# Altium PCB BSR033A.PcbDoc (part 1 of 2)
Units mil, origin at the board's own origin, x right, y up, seen from the top; angles counter-clockwise.
Board outline 1950 x 1400 mil, 2 copper layers (Top Layer, Bottom Layer), stack 61.2 mil thick; 52 components, 17 nets, 86 pads, 24 vias.
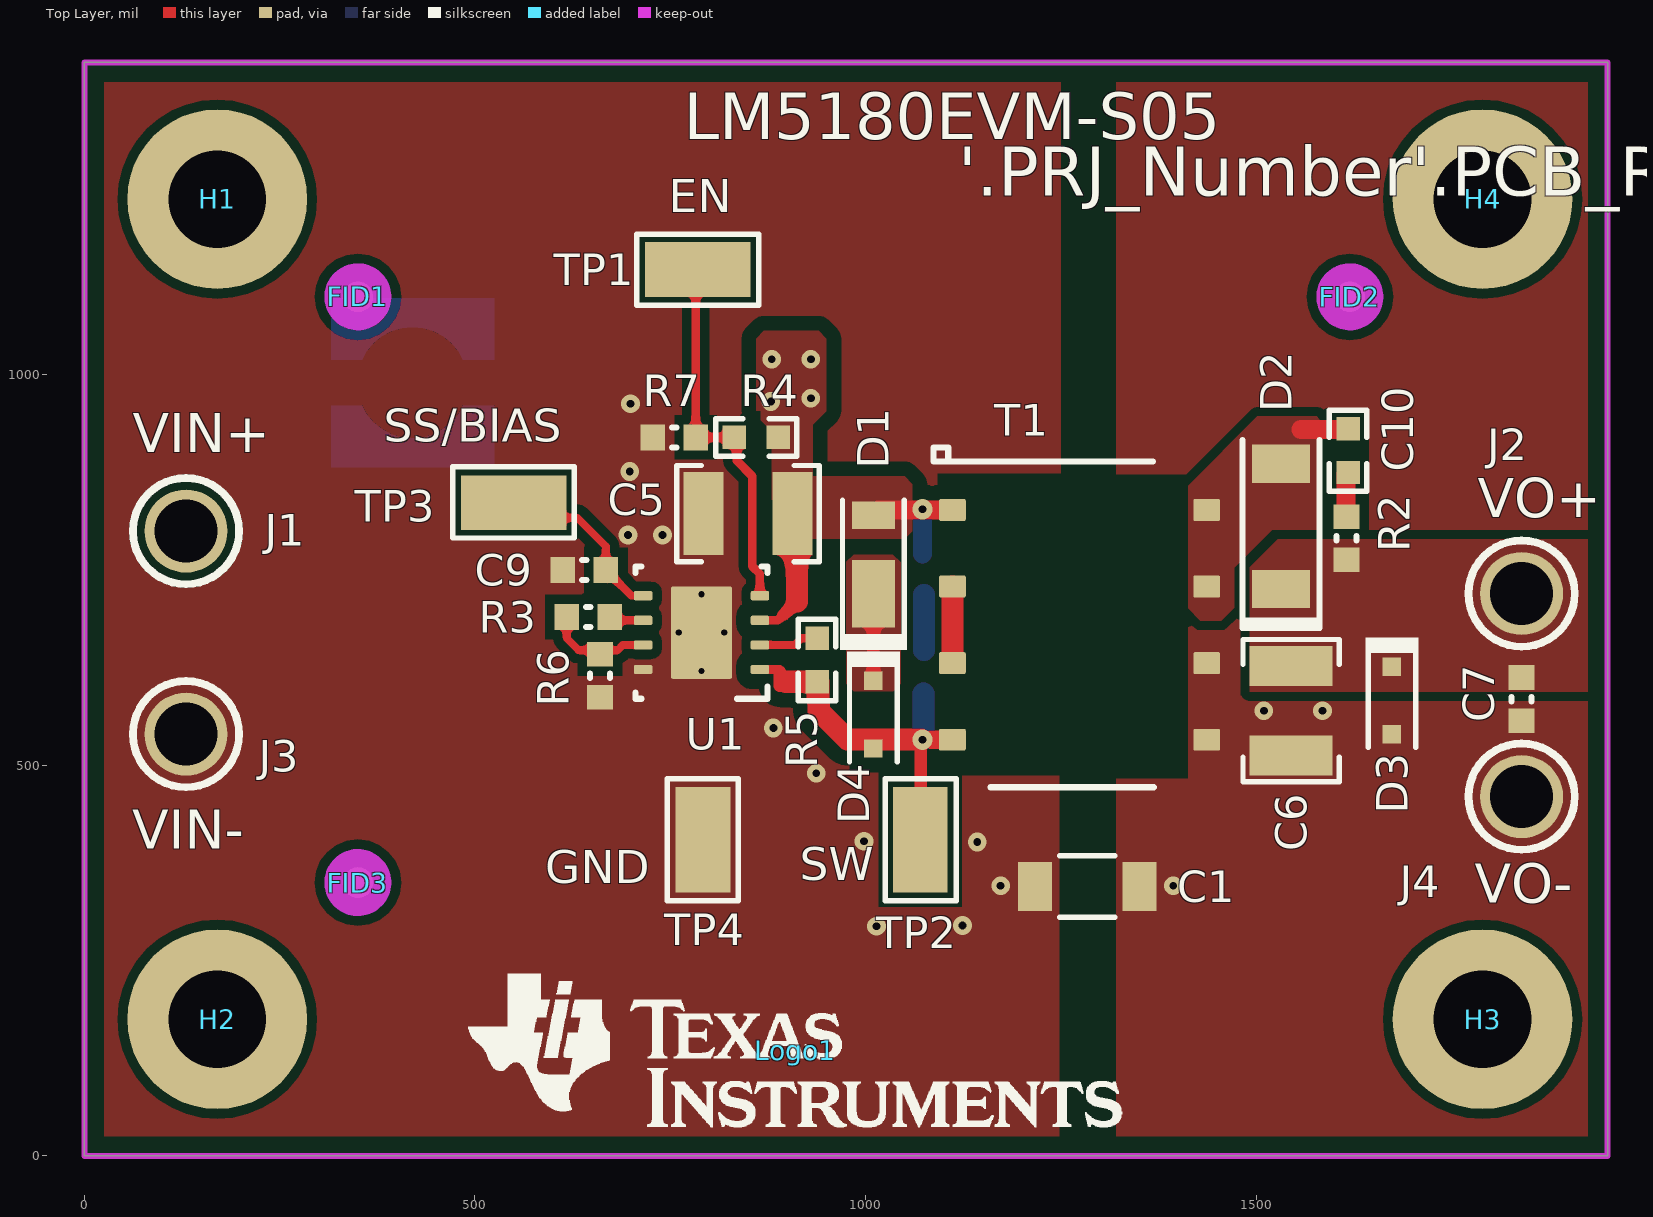
[diagram p0: Top Layer view]
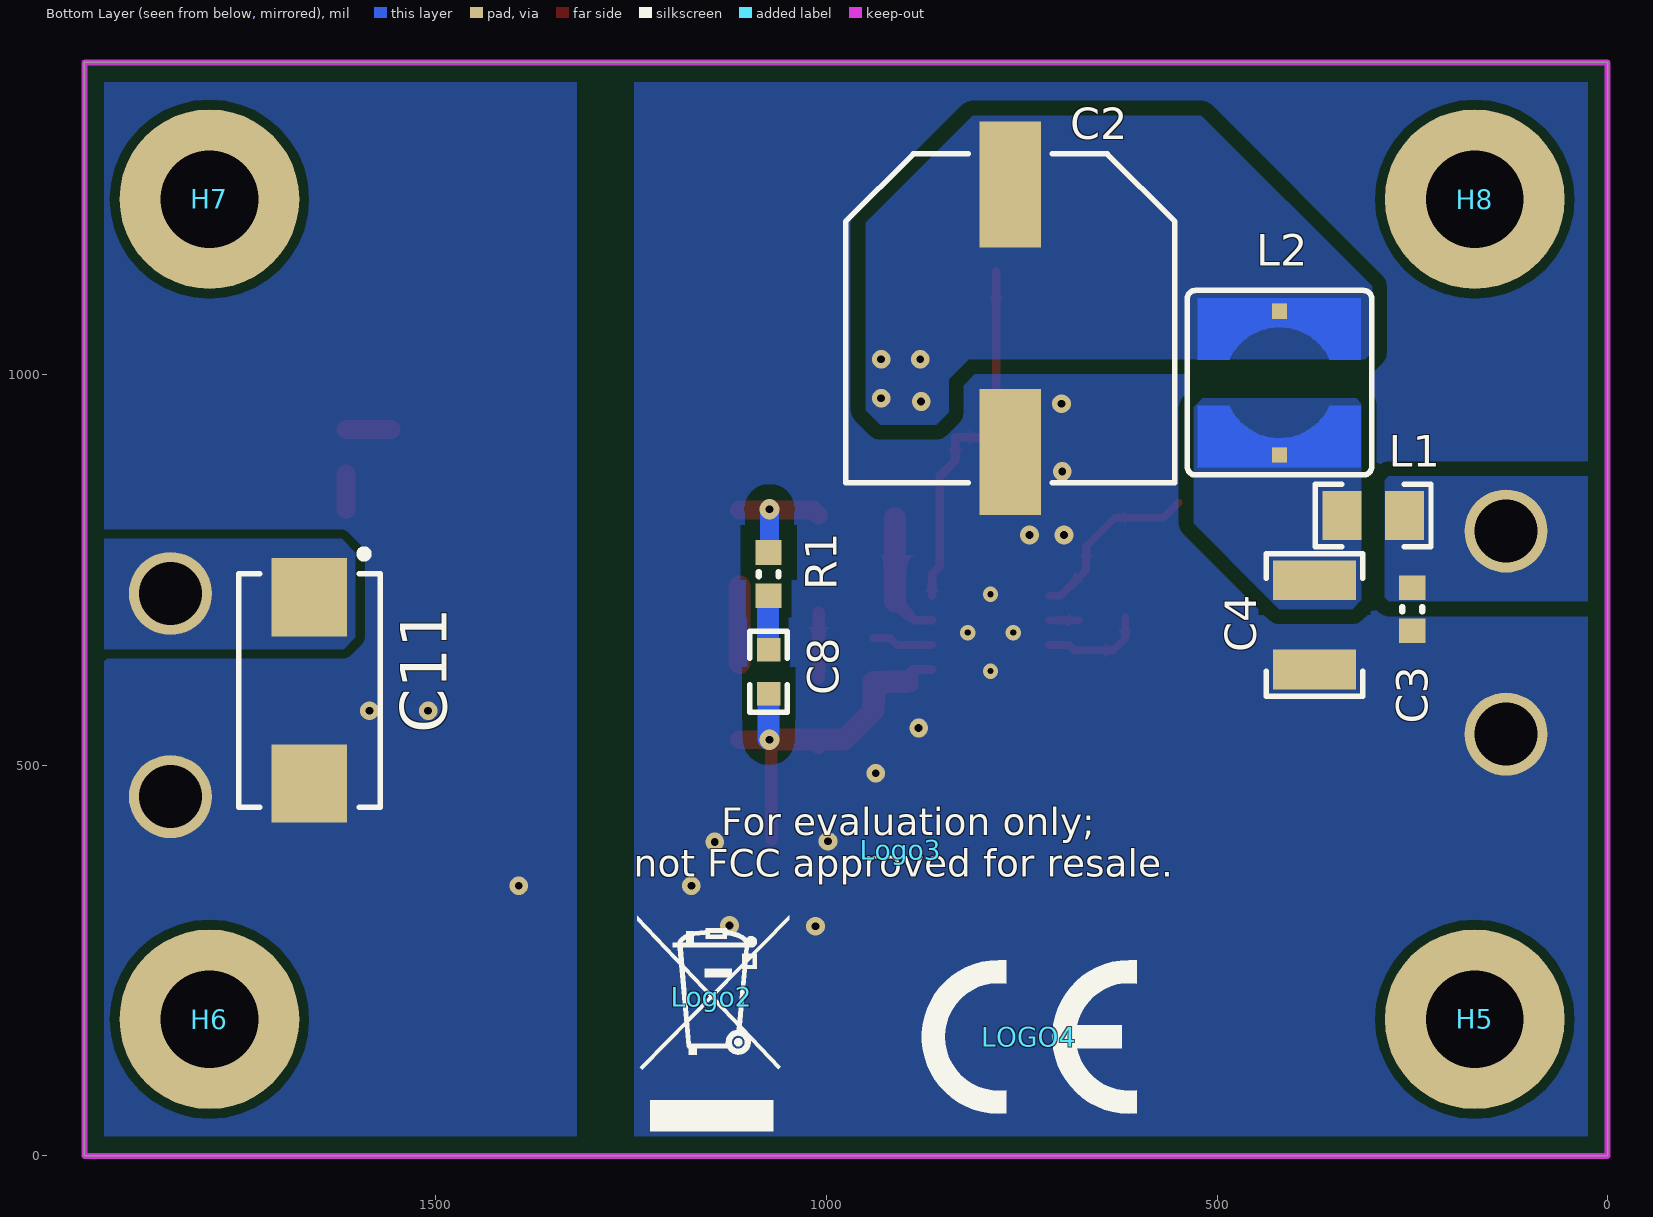
[diagram p1: Bottom Layer view, seen from below]

## Layer stack, top to bottom
Top Solder: solder mask 0.4, Solder Resist, Dk 3.5
Top Layer: signal copper 1.4
Dielectric1: core 58.4, FR-4, Dk 4.8
Bottom Layer: signal copper 1.4
Bottom Solder: solder mask 0.4, Solder Resist, Dk 3.5

## Board outline
0,0 1950,0 1950,1400 0,1400

## Design rules (kind name [scope] priority, off if disabled: settings)
AcuteAngle [All] p1: minimum=4.50000000000000E+0001 checktracksonly=FALSE
AssemblyTestPointUsage [All] p1: valid=2
BoardOutlineClearance BoardOutlineClearance_MountingHoles [OnCopper and InComponentClass('Mounting Holes')] p1: gap=40 ignorepadtopadclearanceinfootprint=FALSE
BoardOutlineClearance BoardOutlineClearance_Poly [OnCopper and IsPoly] p2: gap=25 ignorepadtopadclearanceinfootprint=FALSE
BoardOutlineClearance [OnCopper and Not InComponentClass('Logo') and not InComponentClass('FiducialMark') and not InRegion(1000,500,4000,800) and not InPoly] p3: gap=50 ignorepadtopadclearanceinfootprint=FALSE
Clearance Clearance_HV_Nets [InNetClass('HV_Nets')] p1: gap=19 ignorepadtopadclearanceinfootprint=FALSE
Clearance Clearance_Keepouts [((IsTrack Or IsArc) And Not InPoly) And IsFree and IsKeepOut vs ((IsTrack Or IsArc) And Not InPoly) And IsFree and IsKeepOut] p2: gap=0 ignorepadtopadclearanceinfootprint=FALSE
Clearance Clearance_Poly [InPolygon] p3: gap=12 ignorepadtopadclearanceinfootprint=FALSE
Clearance Clearance_FiducialMark [IsKeepOut and InComponentClass('FiducialMark') vs IsPad and InComponentClass('FiducialMark')] p4: gap=0 ignorepadtopadclearanceinfootprint=FALSE
Clearance [All] p5: gap=7.87 ignorepadtopadclearanceinfootprint=FALSE except(0: Arc-Hole Track-Hole SMDPad-Hole THPad-Hole Via-Hole Fill-Hole Poly-Hole Region-Hole Text-Hole)
ComponentClearance ComponentClearance_MountingHoles_FiducialMarks [InComponentClass('Mounting Holes') vs InComponentClass('FiducialMark')] p1: gap=50 collisioncheckmode=3 verticalgap=10 showdistances=FALSE
ComponentClearance ComponentClearance_Shunt [InComponentClass('Header') vs InComponentClass('Shunt')] p2: gap=0 collisioncheckmode=3 verticalgap=0 showdistances=FALSE
ComponentClearance ComponentClearance_Logo [InComponentClass('Logo')] p3: gap=50 collisioncheckmode=3 verticalgap=10 showdistances=FALSE
ComponentClearance ComponentClearance_ScrewToNut [(HasFootprint('NY PMS 440 0025 PH')) vs (HasFootprint('Keystone_1902C'))] p4: gap=5 collisioncheckmode=3 verticalgap=10 showdistances=FALSE
ComponentClearance ComponentClearance_MountingHoles [InComponentClass('Mounting Holes')] p5: gap=0 collisioncheckmode=3 verticalgap=0 showdistances=FALSE
ComponentClearance ComponentClearance_SmallPassives [HasFootprint('0201*') or HasFootprint('0402*') or HasFootprint('0508') or HasFootprint('0603*') or HasFootprint('0612') or HasFootprint('0805*') or HasFootprint('0815*') or HasFootprint('0830*') or HasFootprint('1206*') or HasFootprint('1210*') or HasFootprint('1808*') or HasFootprint('1812*') or HasFootprint('1825*') or HasFootprint('2010*') or HasFootprint('2220*') or HasFootprint('2225*') or HasFootprint('2512*') or HasFootprint('2728*') or HasFootprint('3518*') vs HasFootprint('0201*') or HasFootprint('0402*') or HasFootprint('0508') or HasFootprint('0603*') or HasFootprint('0612') or HasFootprint('0805*') or HasFootprint('0815*') or HasFootprint('0830*') or HasFootprint('1206*') or HasFootprint('1210*') or HasFootprint('1808*') or HasFootprint('1812*') or HasFootprint('1825*') or HasFootprint('2010*') or HasFootprint('2220*') or HasFootprint('2225*') or HasFootprint('2512*') or HasFootprint('2728*') or HasFootprint('3518*')] p6: gap=14.96 collisioncheckmode=3 verticalgap=10 showdistances=FALSE
ComponentClearance ComponentClearance_THtoSMT [IsThruComponent vs IsSMTComponent] p7: gap=20 collisioncheckmode=3 verticalgap=30 showdistances=FALSE
ComponentClearance ComponentClearance_THtoTH [IsThruComponent vs IsThruComponent] p8: gap=30 collisioncheckmode=3 verticalgap=30 showdistances=FALSE
ComponentClearance [All] p9: gap=10 collisioncheckmode=3 verticalgap=10 showdistances=FALSE
DiffPairsRouting [All] p1: maxlimit=100 minlimit=10 mostfreqgap=10 toplayer_minwidth=15 toplayer_maxwidth=15 toplayer_prefwidth=15 bottomlayer_minwidth=15 bottomlayer_maxwidth=15 bottomlayer_prefwidth=15 maxuncoupledlength=1000
FabricationTestPointUsage TestPointUsage [All] p1: valid=2 allowmultiple=FALSE
FabricationTestpoint Testpoint [All] p1: side=3 testpointundercomponent=TRUE minsize=40 maxsize=100 preferedsize=60 minholesize=0 maxholesize=40 preferedholesize=32 testpointgrid=1 allowsidetop=TRUE allowsidebottom=TRUE usegrid=TRUE gridtolerance=0.01
FanoutControl Fanout_LCC [IsLCC] p1: bgadir=Out bgaviamode=Centered fanoutstyle=Auto fanoutdirection=Alternating viagrid=1 // Fanout_LCC (Default Rule)
FanoutControl Fanout_BGA [IsBGA] p2: bgadir=Out bgaviamode=Centered fanoutstyle=Auto fanoutdirection=Alternating viagrid=1 // Fanout_BGA (Default Rule)
FanoutControl Fanout_Default [All] p4: bgadir=Out bgaviamode=Centered fanoutstyle=Auto fanoutdirection=Alternating viagrid=1 // Fanout_Default (Default Rule)
FanoutControl Fanout_Small [(CompPinCount < 5)] p5: bgadir=Out bgaviamode=Centered fanoutstyle=Auto fanoutdirection=OutThenIn viagrid=1 // Fanout_Small (Default Rule)
HoleSize [All] p1: absolutevalues=TRUE maxlimit=251 minlimit=7.87 maxpercent=80.000 minpercent=20.000
MinimumAnnularRing MinimumAnnularRing_ThermalPadVias [IsVia and InAnyComponent] p1: minimumring=5.91
MinimumAnnularRing [All] p2: minimumring=7
MinimumSolderMaskSliver MinimumSolderMaskSliver_Logo [InComponentClass('Logo') vs InComponentClass('Logo')] p1: minsoldermaskwidth=0.7
MinimumSolderMaskSliver [All] p2: minsoldermaskwidth=3.94
PlaneConnect [All] p1: planeconnectstyle=Relief reliefexpansion=10 reliefentries=4 reliefconductorwidth=10 reliefairgap=10
PolygonConnect [All] p1: connectstyle=Direct reliefconductorwidth=10 reliefentries=4 polygonreliefangle="90 Angle" airgapwidth=10
RoutingVias ThermalPadVias [IsVia and InAnyComponent] p1: holewidth=7.87 width=19.68 viastyle="Through Hole" minholewidth=7.87 minwidth=19.68 maxholewidth=12.99 maxwidth=23.62
RoutingVias [All] p2: holewidth=16 width=34 viastyle="Through Hole" minholewidth=7.87 minwidth=12 maxholewidth=40 maxwidth=65
SilkToBoardRegionClearance [Not ((IsComment or IsDesignator) And (Hide <> 'False')) and not InRegion(1000,500,4000,800)] p1:
SilkToSilkClearance SilkToSilkClearance_Pb-FreeLogo [(HasFootprint('Pb-Free_Overlay_Medium') OR HasFootprint('Pb-Free_Overlay_Small')) vs (HasFootprint('Pb-Free_Overlay_Medium') OR HasFootprint('Pb-Free_Overlay_Small'))] p1: silktosilkclearance=0
SilkToSilkClearance [All] p2: silktosilkclearance=4
SilkToSolderMaskClearance [IsPad] p1: minsilkscreentomaskgap=5 clearancetoexposedcopper=TRUE
SilkToSolderMaskClearance "Silk to Solder Mask Opening" [All] p2: minsilkscreentomaskgap=4 clearancetoexposedcopper=FALSE
SolderMaskExpansion [All] p1: expansion=1.97
Width [All] p1: maxlimit=100 minlimit=6 preferedwidth=10 checkconnectedcopper=TRUE
15 further rules are at their usual default settings.

## Classes and differential pairs
component class "Mounting Holes": H1 H2 H3 H4 H5 H6 H7 H8
net class BSR033A_Nets: GND NetC2_1 NetC3_1 NetC4_2 NetC6_1 NetC8_1 NetC8_2 NetC9_1 NetC10_1 NetC10_2 NetD1_1 NetR3_1 NetR3_2 NetR4_1 NetR5_1 NetT1_2 NetT1_3 SGND
net class HV_Nets: NetC2_1 NetC3_1 NetC4_2 NetC8_2
component class AssemblyNote: ZZ1 ZZ2 ZZ3
component class FiducialMark: FID1 FID2 FID3
component class BSR033A_Hardware: FID1 FID2 FID3 H1 H2 H3 H4 H5 H6 H7 H8 Logo1 Logo2 Logo3 LOGO4 ZZ1 ZZ2 ZZ3
component class Logo: Logo1
component class BSR033A: C1 C2 C3 C4 C5 C6 C7 C8 C9 C10 C11 D1 D2 D3 D4 J1 J2 J3 J4 L1 L2 R1 R2 R3 R4 R5 R6 R7 SS/Bias T1 TP1 TP2 TP3 TP4 U1

## Components (designator, comment, footprint, x,y, rotation, side; value= is the part's Value field where it differs from the comment)
C1 "202R18W102KV4E" 1206_190 1284,345 r180 top value=1000pF
C2 "EEE-FK2A330P" SM_RADIAL_G 764.72,1072.33 r270 bottom value=33uF
C3 "GRM188R72A104KA35J" 0603L 250,700 r270 bottom value=0.1uF
C4 "GRM32DC72A475KE01L" 1210_220 375,680 r90 bottom value=4.7uF
C5 "GRM32DC72A475KE01L" 1210_220 849.5,822.27 r0 top value=4.7uF
C6 "GRM32EC80J107ME20L" 1210_270 1545,570 r270 top value=100uF
C7 "GRM188R72A104KA35J" 0603L 1840,585 r270 top value=0.1uF
C8 "GRM1885C2A220JA01D" 0603_HV 1074,620 r270 bottom value=22pF
C9 "GCM188R71E473KA37D" 0603L 640,750 r180 top value=0.047uF
C10 "GRM1885C2A220JA01D" 0603_HV 1618,903 r90 top value=22pF
C11 "T598D107M010ATE025" 7343-31 1662,596 r270 bottom value=220uF
D1 "DFLZ24-7" PowerDI123 1010,770 r90 top value=24V
D2 "40V" SMAF 1532,806 r90 top
D3 "MMSZ5232BS-7-F" SOD-323 1674,583 r270 top value=5.6V
D4 "75V" SOD-323 1010,565 r270 top
FID1 "Fiducial" Fiducial10-20 350,1100 r270 top
FID2 "Fiducial" Fiducial10-20 1620,1100 r270 top
FID3 "Fiducial" Fiducial10-20 350,350 r270 top
H1 "PMSSS 440 0025 PH" B_F_PMSSS4400025PH 170,1225 r0 top
H2 "PMSSS 440 0025 PH" B_F_PMSSS4400025PH 170,175 r0 top
H3 "PMSSS 440 0025 PH" B_F_PMSSS4400025PH 1790,175 r0 top
H4 "PMSSS 440 0025 PH" B_F_PMSSS4400025PH 1790,1225 r0 top
H5 "1902C" Keystone_1902C 170,175 r180 bottom
H6 "1902C" Keystone_1902C 1790.36,175 r180 bottom
H7 "1902C" Keystone_1902C 1790,1225 r180 bottom
H8 "1902C" Keystone_1902C 170,1225 r180 bottom
J1 "1573-2" Keystone1573-2 130,800 r270 top
J2 "1573-2" Keystone1573-2 1840,720 r0 top
J3 "1573-2" Keystone1573-2 130,540 r0 top
J4 "1573-2" Keystone1573-2 1840,460 r0 top
L1 "742792021" 0805_HV 300,820 r0 bottom value="22 ohm"
L2 "744042100" WE-TPC-M1 420,990 r90 bottom value=10uH
Logo1 "Texas Instruments" TI_Stacked_Overlay_Small 910,135 r0 top
Logo2 "WEEE logo" WEEE_Minimum 1147,204 r180 bottom
Logo3 "FCC disclaimer" FCC_disclaimer_stacked 905,392 r180 bottom
LOGO4 "CE Mark" CE_Mark_5mm 740.25,152.45 r180 bottom
R1 "CRCW0603100RFKEA" 0603L 1074,745 r90 bottom value=100
R2 "CRCW0603100RFKEA" 0603L 1616,791 r90 top value=100
R3 "CRCW0603130KFKEA" 0603L 645,690 r0 top value=130k
R4 "CRCW0603536KFKEA" 0603_HV 860,920 r0 top value=536k
R5 "CRCW0603158KFKEA" 0603_HV 938,635 r270 top value=158k
R6 "CRCW060312K1FKEA" 0603L 660,615 r90 top value=12.1k
R7 "CRCW0603100KFKEA" 0603L 755,920 r0 top value=100k
T1 "YA8779-BL" Coilcraft_YA8779-CL 1274,680 r0 top value=30uH
TP1 "EN" Testpoint_Keystone_Miniature 785,1135 r0 top
TP2 "SW" Testpoint_Keystone_Miniature 1070,405 r90 top
TP3 "SS/BIAS" Testpoint_Keystone_Miniature 549.37,836.18 r180 top
TP4 "GND" Testpoint_Keystone_Miniature 792,405 r270 top
U1 "LM5180QNGURQ1" NGU0008C 790,670 r180 top
ZZ1 "These assemblies must be clean and free from flux and all contaminants.  Use of no clean flux is not acceptable." AssemblyNote 95,3740.56 r0 top
ZZ2 "These assemblies must comply with workmanship standards IPC-A-610 Class 2., unless otherwise specified." AssemblyNote 95,3652 r0 top
ZZ3 "Mounting hardware H1 thru H8 to be installed in corner holes provided.  Screw inserted from component side, standoff on solder side." AssemblyNote 94,3552 r0 top

## Footprints (in the part's own frame and the unit in brackets; to place one, negate y for a bottom-side part, rotate by r counter-clockwise, add the part's x,y. Pads: shape width x height; smd on the part's side, far side on the other; paste and mask are expansions set on the pad)
0603_HV [mil] "Ernesto recommended land pattern.  26 mil between pads."
  rect 30x30 smd: 1(-28,0) 2(28,0)
  silkscreen extent -52,-24 52,24, body extent -34,-19 34,19, height 39
0603L [mm] "0603 from SM-752 data"
  rect 0.8x0.85 smd: 1(-0.7,0) 2(0.7,0)
  silkscreen extent -0.07,-0.33 0.07,0.33, body extent -0.87,-0.47 0.87,0.47, height 1
0805_HV [mil] "0805 with 30mil clearance between pads"
  rect 50x63 smd: 1(-40,0) 2(40,0)
  silkscreen extent -74,-40 74,40, body extent -43,-29 43,29, height 57
1206_190 [mm] "1206_190"
  rect 1.1x1.6 smd: 1(-1.7,0) 2(1.7,0)
  silkscreen extent -0.9,-1 0.9,1, body extent -1.75,-0.95 1.75,0.95, height 1.9
1210_220 [mm] "1210"
  rect 1.3x2.7 smd: 1(-1.45,0) 2(1.45,0)
  silkscreen extent -2.32,-1.57 2.32,1.57, body extent -1.7,-1.35 1.7,1.35, height 2.2
1210_270 [mm] "1210"
  rect 1.3x2.7 smd: 1(-1.45,0) 2(1.45,0)
  silkscreen extent -2.32,-1.57 2.32,1.57, body extent -1.7,-1.35 1.7,1.35, height 2.7
7343-31 [mm] "Medium Density based on Kemet T495 dimensions"
  rect 2.55x2.45 smd: 1(-3.025,0) 2(3.025,0)
  silkscreen extent -4.56,-2.3 3.8,2.3, body extent -3.8,-2.3 3.8,2.3, height 3.1
AssemblyNote [mil] "Assembly Note"
B_F_PMSSS4400025PH [mil] "MACHINE SCREW PAN PHILLIPS 4-40"
  round 230 hole 125: 1(0,0)
  body extent -109,-109 110,110, height 79
CE_Mark_5mm [mil] "Minimum text height for CE Mark"
  silkscreen extent -138,-98 138,98
Coilcraft_YA8779-CL [mm] "SMD, 8-Leads, Body 9.3x10.2mm, Pitch 2.49mm"
  rrect14% 0.87x0.71 smd: 1(-4.135,3.735) 2(-4.135,1.245) 3(-4.135,-1.245) 4(-4.135,-3.735) 5(4.135,-3.735) 6(4.135,-1.245) 7(4.135,1.245) 8(4.135,3.735)
  body extent -4.65,-5.1 4.65,5.1, height 10.6
FCC_disclaimer_stacked [mil]
Fiducial10-20 [mm]
  round 1 smd mask+0.5: 1(0,0)
  Top Layer keep-out circle w1.178: c0,0 r0.5
Keystone1573-2 [mm] "Double Turret"
  round 2.7 hole 2.05: 1(0,0)
  silkscreen extent -1.73,-1.73 1.73,1.73, body extent -1.18,-1.18 1.17,1.18, height 4.72
Keystone_1902C [mil] "Hex Standoff, 4-40 threaded, nylon"
  round 1 on Mech4: 0(0,0)
  body extent -145,-126 146,126, height 501
NGU0008C [mm] "SON, 8-Leads, Body 4x4mm, Pitch 0.8mm"
  rrect33% 0.6x0.3 smd: 1(-1.9,1.2) 2(-1.9,0.4) 3(-1.9,-0.4) 4(-1.9,-1.2) 5(1.9,-1.2) 6(1.9,-0.4) 7(1.9,0.4) 8(1.9,1.2)
  rrect8% 1.75x1.31 on Top Paste: 9(0,0.755) 9(0,-0.755)
  rrect5% 1.98x3 smd paste-1.5: 9(0,0)
  silkscreen extent -2.15,-2.15 2.15,2.15, body extent -2,-2 2,2, height 0.77
PowerDI123 [mm] "Diodes Inc recommended land pattern, document number DS30628 Rev. 6-2"
  rect 2.2x1.4 smd: 1(-1.275,0)
  rect 0.9x1.4 smd: 2(1.275,0)
  silkscreen extent -3.1,-1.09 1.76,1.09, body extent -2.38,-0.97 1.52,0.96, height 1
SM_RADIAL_G [mm] "10 x 10.2mm:  Panasonic G"
  rect 4.1x2 smd: 1(-4.35,0) 2(4.35,0)
  silkscreen extent -5.35,-5.35 5.35,5.35, body extent -5.25,-5.25 5.25,5.25, height 10.5
SMAF [mm] "SMD, 2-Leads, Body 3.8x2.5mm"
  rect 1.24x1.89 smd: 1(-2.04,0) 2(2.04,0)
  silkscreen extent -3.4,-1.3 2.8,1.3, body extent -2.35,-1.25 2.35,1.25, height 1
SOD-323 [mm] "NXP recommended land pattern"
  rect 0.6x0.6 smd paste-0.05: 1(-1.1,0) 2(1.1,0)
  silkscreen extent -2.06,-0.86 1.53,0.86, body extent -1.3,-0.67 1.3,0.68, height 1.1
Testpoint_Keystone_Miniature [mil] "Miniature SMT test point"
  rect 135x70 smd: 1(0,0)
  silkscreen extent -78,-46 78,45, body extent -52,-20 52,20, height 61
TI_Stacked_Overlay_Small [mil]
  silkscreen extent -418,-98 418,98
WE-TPC-M1 [mm] "Wurth Elektronik recommended land pattern"
  rect 0.5x0.5 smd: 1(-2.35,0) 2(2.325,0)
  Top Layer region: -0.75,1.64 -1.005,1.504 -1.279,1.279 -1.504,1.005 -1.671,0.692 -1.774,0.353 -1.809,0 -1.774,-0.353 -1.671,-0.692 -1.504,-1.005 -1.279,-1.279 -1.005,-1.504 -0.75,-1.64 -0.75,-2.65 -2.75,-2.65 -2.75,2.65 -0.75,2.65
  Top Layer region: 0.75,1.64 1.005,1.504 1.279,1.279 1.504,1.005 1.671,0.692 1.774,0.353 1.809,0 1.774,-0.353 1.671,-0.692 1.504,-1.005 1.279,-1.279 1.005,-1.504 0.75,-1.64 0.75,-2.65 2.75,-2.65 2.75,2.65 0.75,2.65
  silkscreen extent -3,-3 3,3, body extent -2.5,-2.5 2.5,2.5, height 2
WEEE_Minimum [mil] "WEEElie bin"
  silkscreen extent -95,-172 99,104

## Part data
C1: library part CMP-0008572-2, "CAP, CERM, 1000 pF, 2000 V, +/- 10%, X7R, 1206_190", Cap_Case=1206, Manufacturer="Johanson Technology", TempCo=X7R, Tolerance_%=10%, Value1=Unknown, Value2=2000V, ValueDisplayed=1000pF, AEC Category=Q200, AEC Qualified=?, Cap_F=1nF, ComponentLink1Description="Datasheet link", ComponentLink1URL=http://www.johansondielectrics.com/images/stories/catalog/JDI-Product-Catalog.pdf, CompType=Capacitor, LatestRevisionDate=2017-03-09, MountType=SMT, PackageReference=1206_190, PartNumber=202R18W102KV4E, Polarized=N, Published=2008-06-19, Publisher="Texas Instruments", RoHS=Y, SizeArea_mm2=5.12, SizeAreaWB_mm2=10.92, SizeX_mm=3.2, SizeY_mm=1.6, SizeZ_mm=1.9, TaMax_C=125°C, TaMin_C=-55°C, Technology=Ceramic, U/M=EA, VDC_V=2kV
C2: library part CMP-0011203-2, "CAP, AL, 33 uF, 100 V, +/- 20%, 0.7 ohm, AEC-Q200 Grade 2, SMD", Cap_Case=G, Manufacturer=Panasonic, Supplier Part Number 1=PCE3846CT-ND, Tolerance_%=20%, Value1="0.7 ohm", Value2=100V, ValueDisplayed=33uF, AEC Category=Q200, AEC Grade=2, AEC Qualified=Y, Cap_F=33µF, ComponentLink1Description="Datasheet link", ComponentLink1URL=https://industrial.panasonic.com/cdbs/www-data/pdf/RDE0000/ABA0000C1181.pdf, CompType=Capacitor, ESR_ohm=7d, IRMS_A=2dA, LatestRevisionDate=2017-03-09, MountType=SMT, PackageReference="SMT Radial G", PartNumber=EEE-FK2A330P, Polarized=Y, Publisher="Texas Instruments", RoHS=Y, Series=FK, SizeArea_mm2=123.6, SizeAreaWB_mm2=172.2, SizeX_mm=12, SizeY_mm=10.3, SizeZ_mm=10.2, Supplier 1=Digi-Key, Supplier 2=Mouser, Supplier 3=Farnell, Supplier Part Number 2=667-EEE-FK2A330P, Supplier Part Number 3=1850130, TaMax_C=105°C, TaMin_C=-55°C, Technology=AL, U/M=EA, VDC_V=100V
C3 C7: library part CMP-0007470-5, "CAP, CERM, 0.1 uF, 100 V, +/- 10%, X7R, 0603", Cap_Case=0603, Manufacturer=MuRata, Supplier Part Number 1=490-6439-1-ND, TempCo=X7R, Tolerance_%=10%, Value1=Unknown, Value2=100V, ValueDisplayed=0.1uF, AEC Category=Q200, AEC Qualified=?, Cap_F=100nF, ComponentLink1Description="Datasheet link", ComponentLink1URL=http://search.murata.co.jp/Ceramy/image/img/A01X/G101/ENG/GRM188R72A104KA35-01.pdf, CompType=Capacitor, LatestRevisionDate=2017-03-09, MountType=SMT, PackageReference=0603, PartNumber=GRM188R72A104KA35J, Polarized=N, Published=2008-06-19, Publisher="Texas Instruments", RoHS=Y, SizeArea_mm2=1.28, SizeAreaWB_mm2=4.68, SizeX_mm=1.6, SizeY_mm=0.8, SizeZ_mm=1, Supplier 1=Digi-Key, Supplier 2=Mouser, Supplier Part Number 2=81-GRM188R72A104KA5J, TaMax_C=125°C, TaMin_C=-55°C, Technology=Ceramic, U/M=EA, VDC_V=100V
C4 C5: library part CMP-0009182-2, "CAP, CERM, 4.7 uF, 100 V, +/- 10%, X7S, 1210", Cap_Case=1210, Manufacturer=MuRata, Supplier Part Number 1=81-GRM32DC72A475KE1L, TempCo=X7S, Tolerance_%=10%, Value1=Unknown, Value2=100V, ValueDisplayed=4.7uF, AEC Category=Q200, AEC Grade=N/A, AEC Qualified=N, Cap_F=4.7µF, ComponentLink1Description="Datasheet link", ComponentLink1URL=http://search.murata.co.jp/Ceramy/image/img/A01X/G101/ENG/GRM32DC72A475KE01-01.pdf, CompType=Capacitor, LatestRevisionDate=2017-03-09, MountType=SMT, PackageReference=1210, PartNumber=GRM32DC72A475KE01L, Polarized=N, Published=2008-06-19, Publisher="Texas Instruments", RoHS=Y, SizeArea_mm2=8, SizeAreaWB_mm2=14.7, SizeX_mm=3.2, SizeY_mm=2.5, SizeZ_mm=2.2, Supplier 1=Mouser, TaMax_C=125°C, TaMin_C=-55°C, Technology=Ceramic, U/M=EA, VDC_V=100V
C6: library part CMP-0009199-2, "CAP, CERM, 100 uF, 6.3 V, +/- 20%, X6S, 1210", Cap_Case=1210, Manufacturer=MuRata, Supplier Part Number 1=GRM32EC80J107ME20L-ND, TempCo=X6S, Tolerance_%=20%, Value1=Unknown, Value2=6.3V, ValueDisplayed=100uF, AEC Category=Q200, AEC Qualified=?, Cap_F=100µF, ComponentLink1Description="Datasheet link", ComponentLink1URL=http://search.murata.co.jp/Ceramy/PnsearchViewAction.do?HnOFG=ON&HnNFG=ON&SEL_CNT=50&sLang=en&sKey=GRM32EC80J107ME20L&x=9&y=9&search=startwith, CompType=Capacitor, LatestRevisionDate=2017-03-09, MountType=SMT, PackageReference=1210, PartNumber=GRM32EC80J107ME20L, Polarized=N, Published=2008-06-19, Publisher="Texas Instruments", RoHS=Y, SizeArea_mm2=8, SizeAreaWB_mm2=14.7, SizeX_mm=3.2, SizeY_mm=2.5, SizeZ_mm=2.7, Supplier 1=Digi-Key, Supplier 2=Mouser, Supplier 3=Farnell, Supplier Part Number 2=81-GRM32EC80J107ME0L, Supplier Part Number 3=1889302, TaMax_C=105°C, TaMin_C=-55°C, Technology=Ceramic, U/M=EA, VDC_V=6.3V
C8 C10: library part CMP-0007255-4, "CAP, CERM, 22 pF, 100 V, +/- 5%, C0G/NP0, 0603", Cap_Case=0603, Manufacturer=MuRata, Supplier Part Number 1=490-1335-1-ND, TempCo=C0G/NP0, Tolerance_%=5%, Value1=Unknown, Value2=100V, ValueDisplayed=22pF, AEC Category=Q200, AEC Qualified=?, Cap_F=22pF, ComponentLink1Description="Datasheet link", ComponentLink1URL=http://search.murata.co.jp/Ceramy/PnsearchViewAction.do?HnOFG=ON&HnNFG=ON&SEL_CNT=50&sLang=en&sKey=GRM1885C2A220JA01D&x=9&y=9&search=startwith, CompType=Capacitor, LatestRevisionDate=2017-03-09, MountType=SMT, PackageReference=0603, PartNumber=GRM1885C2A220JA01D, Polarized=N, Published=2008-06-19, Publisher="Texas Instruments", RoHS=Y, SizeArea_mm2=1.28, SizeAreaWB_mm2=4.68, SizeX_mm=1.6, SizeY_mm=0.8, SizeZ_mm=1, Supplier 1=Digi-Key, Supplier 2=Mouser, Supplier Part Number 2=81-GRM1885C2A220JA01, TaMax_C=125°C, TaMin_C=-55°C, Technology=Ceramic, U/M=EA, VDC_V=100V
C9: library part CMP-0007141-5, "CAP, CERM, 0.047 uF, 25 V, +/- 10%, X7R, AEC-Q200 Grade 1, 0603", Cap_Case=0603, Manufacturer=MuRata, Supplier Part Number 1=490-8018-1-ND, TempCo=X7R, Tolerance_%=10%, Value1=Unknown, Value2=25V, ValueDisplayed=0.047uF, AEC Category=Q200, AEC Grade=1, AEC Qualified=Y, Cap_F=47nF, ComponentLink1Description="Datasheet link", ComponentLink1URL=http://psearch.murata.com/capacitor/product/GCM188R71E473KA37%23.pdf, CompType=Capacitor, LatestRevisionDate=2017-03-09, MountType=SMT, PackageReference=0603, PartNumber=GCM188R71E473KA37D, Polarized=N, Published=2008-06-19, Publisher="Texas Instruments", RoHS=Y, SizeArea_mm2=1.28, SizeAreaWB_mm2=4.68, SizeX_mm=1.6, SizeY_mm=0.8, SizeZ_mm=1, Supplier 1=Digi-Key, Supplier 2=Mouser, Supplier Part Number 2=81-GCM188R71E473KA7D, TaMax_C=125°C, TaMin_C=-55°C, Technology=Ceramic, U/M=EA, VDC_V=25V
C11: library part CMP-0074683-2, "CAP, Aluminum Polymer, 220 µF, 6.3 V,+/- 20%, 0.01 ohm, 7343-31 SMD", Cap_Case=7343-31, Manufacturer=MuRata, PartNumber=ECASD60J227M010K00, Supplier Part Number 1=490-12529-1-ND, Tolerance_%=20%, Value1="0.01 ohm", Value2=6.3V, ValueDisplayed=220µF, AEC Category=Q200, AEC Grade=N/A, AEC Qualified=N, Cap_F=220µF, ComponentLink1Description="Datasheet link", ComponentLink1URL=http://www.murata.com/~/media/webrenewal/support/library/catalog/products/capacitor/polymer/c90e.ashx, CompType=Capacitor, ESR_ohm=0.01, IRMS_A=3A, MountType=SMT, PackageReference=7343-31, Polarized=Y, RoHS=Y, Series=ECAS, SizeArea_mm2=31.39, SizeAreaWB_mm2=58.59, SizeX_mm=7.3, SizeY_mm=4.3, SizeZ_mm=3.1, Supplier 1=Digi-Key, Supplier 2=Newark, Supplier 3=Mouser, Supplier Part Number 2=11AC3033, Supplier Part Number 3=81-ECASD60J227M010K0, TaMax_C=105°C, TaMin_C=-40°C, Technology="Aluminum Polymer", VDC_V=6.3V
D1: library part CMP-0005415-2, "Diode, Zener, 24 V, 1 W, PowerDI123", Manufacturer="Diodes Inc.", Power_W=1W, Supplier Part Number 1=DFLZ24DICT-ND, AEC Category=Q101, AEC Qualified=?, ComponentLink1Description="Datasheet link", ComponentLink1URL=http://www.diodes.com/datasheets/ds30464.pdf, CompType=Zener, LatestRevisionDate=2017-03-09, LatestRevisionNote="Updated Supplier Data", MountType=SMT, PackageReference=PowerDI123, PartNumber=DFLZ24-7, Published=2008-10-08, Publisher="Texas Instruments", RJA_CperW=110, RoHS=Y, SizeArea_mm2=6.586, SizeAreaWB_mm2=13.066, SizeX_mm=3.7, SizeY_mm=1.78, SizeZ_mm=0.98, Supplier 1=Digi-Key, Supplier 2=Mouser, Supplier 3=Farnell, Supplier Part Number 2=621-DFLZ24-7, Supplier Part Number 3=2077975, U/M=EA, Value1=1W, Vz_V=24V
D2: library part CMP-0028855-1, "Diode, Schottky, 40 V, 3 A, AEC-Q101, SMAF", Manufacturer="Fairchild Semiconductor", PartNumber=FSV340AF, Supplier Part Number 1=FSV340AFCT-ND, Value1=3A, Value2=0.5V, AEC Category=Q101, AEC Qualified=Y, ComponentLink1Description="Datasheet link", ComponentLink1URL=https://www.fairchildsemi.com/datasheets/FS/FSV330AF.pdf, CompType=Diode, Green_EU RoHS=Incomplete, Green_EU RoHS-2=Incomplete, Green_Lifecycle="Not Set", Green_REACh=Incomplete, Io_A=3A, LatestRevisionDate=2017-05-08, MountType=SMT, PackageReference=SMAF, Published=2008-06-26, Publisher="Texas Instruments", RoHS=Y, SizeArea_mm2=11.75, SizeAreaWB_mm2=19.95, SizeX_mm=4.7, SizeY_mm=2.5, SizeZ_mm=1, Supplier 1=Digi-Key, Supplier 2=Mouser, Supplier Part Number 2=512-FSV340AF, TJmax_C=150°C, Type=Schottky, U/M=EA, Vf_V=5dV, Vr_V=40V
D3: library part CMP-0005855-1, "Diode, Zener, 5.6 V, 200 mW, SOD-323", Manufacturer="Diodes Inc.", Power_W=200mW, Supplier Part Number 1=MMSZ5232BS-FDICT-ND, Value1=0.2W, AEC Category=Q101, AEC Qualified=?, ComponentLink1Description="Datasheet link", ComponentLink1URL=http://www.diodes.com/datasheets/ds31038.pdf, CompType=Zener, LatestRevisionDate=2017-03-09, LatestRevisionNote="Updated Supplier Data", MountType=SMT, PackageReference=SOD-323, PartNumber=MMSZ5232BS-7-F, Published=2008-10-08, Publisher="Texas Instruments", RJA_CperW=350, RoHS=Y, SizeArea_mm2=3.645, SizeAreaWB_mm2=8.695, SizeX_mm=2.7, SizeY_mm=1.35, SizeZ_mm=1, Supplier 1=Digi-Key, Supplier 2=Mouser, Supplier Part Number 2=621-MMSZ5232BS-F, U/M=EA, Vz_V=5.6V
D4: library part CMP-0029019-1, "Diode, Ultrafast, 75 V, 0.25 A, SOD-323", Manufacturer="Central Semiconductor", PartNumber=CMDD4448, Value1=0.25A, Value2=1.2V, AEC Category=Q101, AEC Qualified=?, ComponentLink1Description="Datasheet link", ComponentLink1URL=http://www.centralsemi.com/PDFs/products/CMDD4448.PDF, CompType=Diode, Green_EU RoHS=Incomplete, Green_EU RoHS-2=Incomplete, Green_Lifecycle="Not Set", Green_REACh=Incomplete, Io_A=2.5dA, LatestRevisionDate=2017-05-08, MountType=SMT, PackageReference=SOD-323, Published=2008-06-26, Publisher="Texas Instruments", RoHS=Y, SizeArea_mm2=3.645, SizeAreaWB_mm2=8.695, SizeX_mm=2.7, SizeY_mm=1.35, SizeZ_mm=1, TJmax_C=175°C, Type=Ultrafast, U/M=EA, Vf_V=1.2V, Vr_V=75V
FID1 FID2 FID3: "Fiducial mark.  There is nothing to buy or mount.", Manufacturer=N/A, ClassName=FiducialMark, CompType=Fiducial, LatestRevisionDate=2016-12-05, LatestRevisionNote="Added Alternate PartNumber and Alternate Manufacturer parameters to appropriate components.", MountType=N/A, PackageReference=N/A, PartNumber=N/A, Publisher="Texas Instruments", SymbolCreator=codlsc, SymbolVersion=2009-11-4
H1 H2 H3 H4: library part CMP-0003715-1, "MACHINE SCREW PAN PHILLIPS 4-40", Manufacturer="B&F Fastener Supply", Supplier Part Number 1=H703-ND, ClassName="Mounting Holes", Component Classes=MountingHoles, ComponentLink1Description="Datasheet Link", ComponentLink1URL=http://www.fasnetdirect.com/refguide/Machinepancombo.pdf, CompType=Standoff, Key="PMSSS 440 0025 PH", LatestRevisionDate=2017-03-09, MountType=TH, PackageReference="Machine Screw, 4-40, 1/4 inch", PartNumber="PMSSS 440 0025 PH", Publisher="Texas Instruments", RoHS=Y, Supplier 1=Digi-Key
  H3: Rule=Undefined
H5 H6 H7 H8: library part CMP-0003610-1, "Standoff, Hex, 0.5\"L #4-40 Nylon", Manufacturer=Keystone, Supplier Part Number 1=36-1902C-ND, ClassName="Mounting Holes", Component Classes=MountingHoles, ComponentLink1Description="Datasheet Link", ComponentLink1URL=http://www.keyelco.com/pdfs/M55-prod31.pdf, CompType=Hardware, Key=1902C, LatestRevisionDate=2017-03-09, MountType=N/A, PackageReference=Standoff, PartNumber=1902C, Publisher="Texas Instruments", RoHS=Y, Supplier 1=Digi-Key
J1 J2 J3 J4: library part CMP-0055119-1, "Terminal, Turret, TH, Double", Manufacturer=Keystone, Supplier Part Number 1=36-1573-2-ND, CNHeader=FALSE, ComponentLink1Description="Datasheet URL", ComponentLink1URL=http://www.keyelco.com/pdfs/M55p126.pdf, CompType="Turret Terminal", CT=FALSE, Green_EU RoHS=Passed, Green_EU RoHS-2=Incomplete, Green_Lifecycle=Active, Green_REACh=Passed, LatestRevisionDate=26/05/2017, MountType=TH, PackageReference=Keystone1573-2, PartNumber=1573-2, Publisher="Texas Instruments", RoHS=Y, Supplier 1=Digi-Key
L1: library part CMP-0003072-1, "Ferrite Bead, 22 ohm @ 100 MHz, 6 A, 0805", Manufacturer="Wurth Elektronik", Supplier Part Number 1=732-4637-1-ND, Value1="0.008 ohm", Value2=6A, ValueDisplayed="22 ohm", ComponentLink1Description="Datasheet link", ComponentLink1URL=http://katalog.we-online.de/pbs/datasheet/742792021.pdf, CompType="Ferrite Bead", DCR_ohm=8m, Imax_A=6A, LatestRevisionDate=2017-03-09, MountType=SMT, PackageReference=0805, PartNumber=742792021, Published=2014-04-30, Publisher="Texas Instruments", RoHS=Y, SizeArea_mm2=2.5, SizeAreaWB_mm2=6.75, SizeX_mm=2, SizeY_mm=1.25, SizeZ_mm=1.45, Supplier 1=Digi-Key, Supplier 2=Mouser, Supplier Part Number 2=710-742792021, Ztyp@1GHz_Ohm=40.219, ZTyp@100MHz_Ohm=22
L2: library part CMP-0063804-1, "Inductor, Shielded Drum Core, Ferrite, 10 uH, 1 A, 0.12 ohm, SMD", Manufacturer="Wurth Elektronik", Supplier Part Number 1=732-1025-1-ND, Value1="0.12 ohm", Value2=1A, ValueDisplayed=10uH, AEC Category=Q200, AEC Qualified=?, ComponentLink1Description="Datasheet link", ComponentLink1URL=http://www.we-online.com/eisos/pdf/744042100.pdf, CompType=Inductor, DCR_ohm=1.2d, Green_EU RoHS=Passed, Green_EU RoHS-2=Incomplete, Green_Lifecycle=Active, Green_REACh=Passed, Imax_A=1A, Ind_H=10µH, Irms="1.3A @ 30C rise", Isat="1A @ 35% inductance drop", LatestRevisionDate=2017-06-02, Material=Ferrite, MountType=SMT, PackageReference=WE-TPC-M1, PartNumber=744042100, Published=2008-06-26, Publisher="Texas Instruments", RoHS=Y, SizeArea_mm2=23.04, SizeAreaWB_mm2=33.64, SizeX_mm=4.8, SizeY_mm=4.8, SizeZ_mm=1.8, Supplier 1=Digi-Key, Supplier 2=Mouser, Supplier 3=Farnell, Supplier Part Number 2=710-744042100, Supplier Part Number 3=1635842, Technology="Shielded Drum Core"
Logo1: library part TI_Logo, "Texas Instrument Corporate Signature", ClassName=Logo, LatestRevisionDate=2016-03-21, Published=2009-03-03, Publisher="Texas Instruments", SymbolCreator=a0412235, SymbolVersion=2011-08-22
Logo2: library part CMP-0074769-1, Lib Reference="WEEE logo", PartNumber="WEEE logo"
Logo3: library part FCC_disclaimer, "FCC_disclaimer", LatestRevisionDate=2016-03-21, Published=2009-03-03, Publisher="Texas Instruments", SymbolCreator=a0412235, SymbolVersion=2016-03-21
R1 R2: library part CMP-0021991-3, "RES, 100, 1%, 0.1 W, 0603", Manufacturer=Vishay-Dale, Power_W=100mW, Supplier Part Number 1=541-100HCT-ND, TempCo="100 ppm/C", Tolerance_%=1%, Value2=0.1W, Value_Code=100R, ValueDisplayed=100, AEC Category=Q200, AEC Qualified=?, ComponentLink1Description="Datasheet link", ComponentLink1URL=http://www.vishay.com/docs/20035/dcrcwe3.pdf, CompType=Resistor, EIA_Code=E96, LatestRevisionDate=2017-03-09, MountType=SMT, PackageReference=0603, PartNumber=CRCW0603100RFKEA, Published=2008-06-26, Publisher="Texas Instruments", Res_ohm=100, RoHS=Y, SizeArea_mm2=1.28, SizeX_mm=1.6, SizeY_mm=0.8, SizeZ_mm=1, Supplier 1=Digi-Key, Supplier 2=Newark, Supplier 3=Mouser, Supplier Part Number 2=52K8078, Supplier Part Number 3=71-CRCW0603-100-E3, Technology="Thick Film", U/M=EA, Value1=1%, VDC_V=75V
R3: library part CMP-0022036-4, "RES, 130 k, 1%, 0.1 W, AEC-Q200 Grade 0, 0603", Manufacturer=Vishay-Dale, Power_W=100mW, Supplier Part Number 1=541-130KHCT-ND, TempCo="100 ppm/C", Tolerance_%=1%, Value2=0.1W, Value_Code=130k, AEC Category=Q200, AEC Grade=0, AEC Qualified=Y, ComponentLink1Description="Datasheet link", ComponentLink1URL=http://www.vishay.com/docs/20035/dcrcwe3.pdf, CompType=Resistor, EIA_Code=E96, MountType=SMT, PackageReference=0603, PartNumber=CRCW0603130KFKEA, Res_ohm=130k, RoHS=E, SizeArea_mm2=1.28, SizeX_mm=1.6, SizeY_mm=0.8, SizeZ_mm=1, Supplier 1=Digi-Key, Supplier 2=Newark, Supplier 3=Mouser, Supplier Part Number 2=52K8127, Supplier Part Number 3=71-CRCW0603-130K-E3, Technology="Thick Film", Value1=1%, ValueDisplayed=130k, VDC_V=75V
R4: library part CMP-0022488-4, "RES, 536 k, 1%, 0.1 W, AEC-Q200 Grade 0, 0603", Manufacturer=Vishay-Dale, Power_W=100mW, Supplier Part Number 1=541-536KHCT-ND, TempCo="100 ppm/C", Tolerance_%=1%, Value2=0.1W, Value_Code=536k, AEC Category=Q200, AEC Grade=0, AEC Qualified=Y, ComponentLink1Description="Datasheet link", ComponentLink1URL=http://www.vishay.com/docs/20035/dcrcwe3.pdf, CompType=Resistor, EIA_Code=E96, MountType=SMT, PackageReference=0603, PartNumber=CRCW0603536KFKEA, Res_ohm=536k, RoHS=E, SizeArea_mm2=1.28, SizeX_mm=1.6, SizeY_mm=0.8, SizeZ_mm=1, Supplier 1=Digi-Key, Supplier 2=Mouser, Supplier 3=Farnell, Supplier Part Number 2=71-CRCW0603-536K-E3, Supplier Part Number 3=1872010, Technology="Thick Film", Value1=1%, ValueDisplayed=536k, VDC_V=75V
R5: library part CMP-0022064-4, "RES, 158 k, 1%, 0.1 W, AEC-Q200 Grade 0, 0603", Manufacturer=Vishay-Dale, Power_W=100mW, Supplier Part Number 1=541-158KHCT-ND, TempCo="100 ppm/C", Tolerance_%=1%, Value2=0.1W, Value_Code=158k, AEC Category=Q200, AEC Grade=0, AEC Qualified=Y, ComponentLink1Description="Datasheet link", ComponentLink1URL=http://www.vishay.com/docs/20035/dcrcwe3.pdf, CompType=Resistor, EIA_Code=E96, MountType=SMT, PackageReference=0603, PartNumber=CRCW0603158KFKEA, Res_ohm=158k, RoHS=E, SizeArea_mm2=1.28, SizeX_mm=1.6, SizeY_mm=0.8, SizeZ_mm=1, Supplier 1=Digi-Key, Supplier 2=Newark, Supplier 3=Mouser, Supplier Part Number 2=52K8164, Supplier Part Number 3=71-CRCW0603-158K-E3, Technology="Thick Film", Value1=1%, ValueDisplayed=158k, VDC_V=75V
R6: library part CMP-0022030-3, "RES, 12.1 k, 1%, 0.1 W, 0603", Manufacturer=Vishay-Dale, Power_W=100mW, Supplier Part Number 1=541-12.1KHCT-ND, TempCo="100 ppm/C", Tolerance_%=1%, Value2=0.1W, Value_Code=12k1, ValueDisplayed=12.1k, AEC Category=Q200, AEC Qualified=?, ComponentLink1Description="Datasheet link", ComponentLink1URL=http://www.vishay.com/docs/20035/dcrcwe3.pdf, CompType=Resistor, EIA_Code=E96, LatestRevisionDate=2017-03-09, MountType=SMT, PackageReference=0603, PartNumber=CRCW060312K1FKEA, Published=2008-06-26, Publisher="Texas Instruments", Res_ohm=12.1k, RoHS=Y, SizeArea_mm2=1.28, SizeX_mm=1.6, SizeY_mm=0.8, SizeZ_mm=1, Supplier 1=Digi-Key, Supplier 2=Newark, Supplier 3=Mouser, Supplier Part Number 2=52K8105, Supplier Part Number 3=71-CRCW0603-12.1K-E3, Technology="Thick Film", U/M=EA, Value1=1%, VDC_V=75V
R7: library part CMP-0021990-4, "RES, 100 k, 1%, 0.1 W, AEC-Q200 Grade 0, 0603", Manufacturer=Vishay-Dale, Power_W=100mW, Supplier Part Number 1=541-100KHCT-ND, TempCo="100 ppm/C", Tolerance_%=1%, Value2=0.1W, Value_Code=100k, AEC Category=Q200, AEC Grade=0, AEC Qualified=Y, ComponentLink1Description="Datasheet link", ComponentLink1URL=http://www.vishay.com/docs/20035/dcrcwe3.pdf, CompType=Resistor, EIA_Code=E96, MountType=SMT, PackageReference=0603, PartNumber=CRCW0603100KFKEA, Res_ohm=100k, RoHS=E, SizeArea_mm2=1.28, SizeX_mm=1.6, SizeY_mm=0.8, SizeZ_mm=1, Supplier 1=Digi-Key, Supplier 2=Newark, Supplier 3=Mouser, Supplier Part Number 2=42K3668, Supplier Part Number 3=71-CRCW0603-100K-E3, Technology="Thick Film", Value1=1%, ValueDisplayed=100k, VDC_V=75V
T1: library part CMP-0085524-1, "Transformer, 30 uH, SMD", Manufacturer=Coilcraft, ValueDisplayed=30µH, AEC Category=Q200, AEC Grade=N/A, AEC Qualified=N, ComponentLink1Description="Datasheet URL", ComponentLink1URL="https://sps16.itg.ti.com/sites/KMS/crossdivteams/altium/docs/ComponentDatasheets/YA8779-BL -- 5V single output.pdf", CompType=Transformer, DCR_ohm=0.014, Ind_H=30µH, LeakageInd_H=380nH, Lp=30, MountType=SMT, Ns1toNp=0.33, Ns2toNp=0.33, PackageReference=9.3x10.2mm, PartNumber=YA8779-BL, RoHS=Y, Rsec1_ohm=0.025, Rsec2_ohm=0.025, SizeArea_mm2=94.86, SizeAreaWB_mm2=137.86, SizeX_mm=9.3, SizeY_mm=10.2, SizeZ_mm=10.6
TP1 TP2 TP3 TP4: library part CMP-0055152-1, "Test Point, Miniature, SMT", Manufacturer=Keystone, PartNumber=5015, Supplier Part Number 1=36-5015TR-ND, CNHeader=FALSE, ComponentLink1Description="Datasheet URL", ComponentLink1URL=http://www.keyelco.com/userAssets/store/files/5015.PDF, CompType="Test Point", CT=TRUE, Green_EU RoHS=Passed, Green_EU RoHS-2=Incomplete, Green_Lifecycle=Active, Green_REACh=Passed, LatestRevisionDate=26/05/2017, MountType=SMT, PackageReference=Testpoint_Keystone_Miniature, Publisher="Texas Instruments", RoHS=Y, Supplier 1=Digi-Key, Supplier 2=Mouser, Supplier Part Number 2=534-5015
U1: library part CMP-0078633-2, "70-V PSR Flyback Converter With 100-V, 1.2-A Power Switch and Ultra-Low IQ, NGU0008C (WSON-8)", Alternate Manufacturer="Texas Instruments", Alternate PartNumber=LM5180QNGUTQ1, AEC Category=Q200, AEC Qualified=Y, ComponentLink1Description="Datasheet Link", ComponentLink1URL=http://www.ti.com/lit/ds/symlink/lm5180-q1.pdf, ComponentLink2Description="Product Folder", ComponentLink2URL=http://www.ti.com/product/lm5180-q1, CompType=IC, Manufacturer="Texas Instruments", MountType=SMT, PackageDescription=WSON-8, PackageReference=NGU0008C, PartNumber=LM5180QNGURQ1, SizeArea_mm2=16, SizeAreaWB_mm2=25, SizeX_mm=4, SizeY_mm=4, SizeZ_mm=0.8
ZZ1 ZZ2 ZZ3: library part AssemblyNote, ClassName=AssemblyNote, CompType=AssemblyNote, LatestRevisionDate=2017-05-23, Publisher="Texas Instruments", SymbolCreator=codlsc, SymbolVersion=2010-05-18
LOGO4: LatestRevisionDate=2016-03-21, Published=2009-03-03, Publisher="Texas Instruments", SymbolCreator=a0412235, SymbolVersion=2014-07-08

## Via types
v1: diameter 24, hole 10, Top Layer to Bottom Layer, tented both sides, 18 vias
v2: diameter 19.68, hole 7.87, Top Layer to Bottom Layer, 4 vias
v3: diameter 26, hole 10, Top Layer to Bottom Layer, 2 vias

## Nets (pads, with @x,y where several pads share a name; then routed paths per layer and width w, separated by ;. In a path a pad name is that pad's centre, name@x,y a point inside that pad or via, vN(x,y) a via of type N, cw(c..) or ccw(c..) an arc to the next point about the centre after c; other vN are vias at no path point)
GND: C1.2 C2.2 C3.2 C4.1 C5.1 C9.2 J3.1 R6.1 R7.1 TP4.1 U1.8 U1.9@790,670
  other v1: 1014,294 1124,295 1173,346 1143,402 998,403 937,490 882,548 696,795 740,795 698.14,876.2 699,963
  other v2: 790,620.79 760.86,670 819.13,670 790,719.21
NetC2_1: C2.1 C5.2 D1.2 L2.2 R1.2 R4.2 T1.1 U1.3 | length 321.6
  Top Layer w11: U1.3 887.88,685.75 894.25,692.12
  Top Layer w15: 894.25,692.12 912.13,710
  Top Layer w24: D1.2 1016.85,827.05 T1.1
  Top Layer w28: 912.13,710 C5.2@912.13,816.73
  Bottom Layer w24: R1.2@1073,770.56 v3@1073,824
  other v1: 878.8,965.86 930,970 880,1020 930,1020
  other v3: 1073,828
NetC3_1: C3.1 J1.1 L1.1
NetC4_2: C4.2 L1.2 L2.1
NetC6_1: C6.1 C7.1 C11.1 D2.1 D3.1 J2.1 R2.1
NetC8_1: C8.1 R1.1 | length 70.4
  Bottom Layer w28: C8.1@1075,648 R1.1@1075,718.44
NetC8_2: C8.2 D4.2 R5.2 T1.4 TP2.1 U1.1 | length 493.9
  Top Layer w11: U1.1 890,622.75
  Top Layer w16: 890,602 890,620 ; 890,615 898,607 ; D4.2 D4.2@1011,522.69 ; TP2.1 1070,425 1071,426 v3@1071,532.95
  Top Layer w24: v3@1084,532.95 T1.4
  Top Layer w28: 898,607 940,607 940,570 977,533 D4.2@1010,533 ; D4.2@1011,533 1037.91,533 1037.95,532.95 v3@1071,532.95
  Bottom Layer w28: v3@1074,533.95 C8.2
  other v3: 1073,532.95
NetC9_1: C9.1 TP3.1 U1.5 | length 232.9
  Top Layer w10: TP3.1 568.56,817 631,817 667.56,780.44 C9.1 700.32,717.24 U1.5
NetC10_1: C10.1 R2.2 | length 45.4
  Top Layer w24: R2.2@1615,827.58 C10.1@1615,873.02
NetC10_2: C10.2 D2.2 T1.7 T1.8 | length 57.6
  Top Layer w24: 1557.44,930.05 C10.2@1615,930.05
NetD1_1: D1.1 D4.1 | length 84
  Top Layer w16: D4.1@1010,611.54 D1.1@1010,695.53
NetR3_1: R3.1 R6.2 U1.7 | length 134.2
  Top Layer w10: R3.1@617.56,690 R3.1 617.44,662.76 632.64,647.56 660,647.56 682.56,647.56 689.25,654.25 U1.7
NetR3_2: R3.2 U1.6 | length 38.4
  Top Layer w10: R3.2@676.81,685.75 U1.6
NetR4_1: R4.1 R7.2 TP1.1 U1.4 | length 479.6
  Top Layer w11: R7.2 TP1.1@782.56,1132.56 ; R7.2@783.05,920 797.56,920 835,920 835,890.27 855,870.27 855,755 864.8,745.2 U1.4
NetR5_1: R5.1 U1.2 | length 77.8
  Top Layer w10: U1.2 909.25,654.25 ; 910,655 918,663 R5.1@940,663
NetT1_2: T1.2 T1.3 | length 98
  Top Layer w28: T1.3 T1.2
SGND: C1.1 C6.2 C7.2 C11.2 D3.2 J4.1 T1.5 T1.6
  other v1: 1394,346 1510,570 1585,570
pads on no net: FID1.1 FID2.1 FID3.1 H1.1 H2.1 H3.1 H4.1 H5.0 H6.0 H7.0 H8.0 U1.9@790,640.27 U1.9@790,699.72

## Polygon pours and split planes (outlines as drawn)
NetD1_1 on Top Layer "Top Layer-No Net 5" (solid, pour order 122): 985,770 1035,770 1045,760 1045,604.5 1035.5,595 985,595 975.47,604.53 975.47,760.47
NetC2_1 on Top Layer "Top Layer-No Net 4" (solid, pour order 121): 860,948 860,1046.26 870,1056.26 940,1056.26 950,1046.26 950,953.74 929.26,933 875,933
NetC2_1 on Top Layer "Bottom Layer-No Net 3" (solid, pour order 123): 1050,790 889,790 889,870 1050,870 1060,860 1060,800
NetC6_1 on Top Layer "Top Layer-No Net 2" (solid, pour order 125): 1945.8,594.61 1491.87,594.61 1491.87,753.87 1527.61,789.61 1945.8,789.61
GND on Top Layer "Top Layer-No Net" (solid, pour order 127): 0,1400 1060,1400 1250,1400 1250,874 1092,874 1092,487 1247.76,487 1247.76,0 0,0
SGND on Top Layer "Top Layer-No Net 1" (solid, pour order 126): 1400,1400 1321,1400 1321,873 1413,873 1413,483.15 1321,483.15 1321,0 1950,0 1950,1400
NetC10_2 on Top Layer "Top Layer-No Net 3" (solid, pour order 124): 1413,701 1413,857.95 1501.76,946.88 1581.2,947.03 1581.2,802 1521,802 1472,753 1472,702 1455.29,685.29 1428.71,685.29
NetC2_1 on Top Layer "TOP_LAYER_NETC2_1_P120" (solid, pour order 120): 932.52,944 932.52,840 880,840 880,944
NetC2_1 on Bottom Layer "Bottom Layer-No Net 2" (solid, pour order 131): 310,1020 818,1020 843.56,994.44 843.56,952.06 859.18,936.44 931.44,936.44 950,955 950,1195 813,1332 520,1332 301.37,1113.37 301.37,1028.63
NetC4_2 on Bottom Layer "Bottom Layer-No Net 1" (solid, pour order 130): 315,963.27 315,711.85 326.85,700 420,700 440,720 530,810 530,958.27 518.27,970 321.73,970
NetC3_1 on Bottom Layer "Bottom Layer-No Net" (solid, pour order 128): 1,710 280,710 285,715 285,785 285,865 280,870 0,870
SGND on Bottom Layer "Top Layer-No Net 1" (solid, pour order 132): 1320,1400 1320,0 1950,0 1950,1400
GND on Bottom Layer "Top Layer-No Net" (solid, pour order 133): 0,1400 1246,1400 1246,0 0,0
NetC6_1 on Bottom Layer "BOTTOM_LAYER_NETC6_1_P129" (solid, pour order 129): 1950.03,649.06 1618.04,648.96 1603,664 1603,772.13 1620.87,790 1949.06,790

## Keep-outs
Keep-Out Layer:
  the board outline again, w8
  text ".Layer_Name" at 487,-858.49 h60

## Other copper
Top Layer:
  pour cut-out: 1055,777 1090,777 1090,568 1055,568
  text ".Layer_Name" at 487,-858.49 h60
Bottom Layer:
  pour cut-out: 310.05,699.5 288.65,699.5 288.65,881.3 311.79,881.3
  pour cut-out: 301.16,1010 301.16,980 538.84,980 538.84,1010
  text ".Layer_Name" at 487,-858.49 h60

## Silkscreen, mask and mechanical layers (free items; w line width, h text height)
Top Overlay:
  lines w8: 1106,889 1106,907 1087,907 1087,889 1368,889 ; 1160,472 1369,472
  text "LM5180EVM-S05" at 767,1302 h60
  text "'.PRJ_Number'.PCB_Rev" at 1119,1208 h108.27
  text "EN" at 748,1194 h72.83
  text "VIN+" at 62,901 h50
  text "SS/BIAS" at 383,900 h72.83
  text "VO+" at 1784,818 h50
  text "VIN-" at 61,393 h50
  text "SW" at 916,339 h72.83
  text "GND" at 590,335 h72.83
  text "VO-" at 1780,324 h50
  text ".Layer_Name" at 487,-858.49 h60
Bottom Overlay:
  text ".Layer_Name" at 487,-858.49 h60
Top Paste:
  text ".Layer_Name" at 487,-858.49 h60
Bottom Paste:
  text ".Layer_Name" at 487,-858.49 h60
Top Solder:
  text ".Layer_Name" at 487,-858.49 h60
  text ".Layer_Name" at 487,-858.49 h60
Bottom Solder:
  text ".Layer_Name" at 487,-858.49 h60
Drill Guide:
  text ".Layer_Name" at 487,-858.49 h60
M1 Board Outline:
  the board outline again, w10
  text ".Layer_Name" at 487,-858.49 h60
M2 Board Dimensions:
  rectangle: 35,-400 410,-275
  rectangle: -90,-275 35,-150
  lines w7: -90,-275 910,-275 ; 35,-400 35,-150 ; 160,-400 160,-150 ; 410,-400 410,-150 ; 660,-400 660,-150 ; -90,-400 -90,-150 910,-150 910,-400 -90,-400
  text ".Layer_Name" at 487,-858.49 h60
M3 3D STEP Top:
  text ".Layer_Name" at 487,-858.49 h60
M4 3D STEP Bottom:
  text ".Layer_Name" at 487,-858.49 h60
M5 Assembly Top:
  lines w10: -382,-930.17 6218,-930.17 ; -382,-726.83 6220,-726.83 ; -382,-523.5 -382,-1133.5 3623,-1133.5 6220,-1133.5 6220,-523.5 -381.5,-523.5 -381.5,-1133.5 1194,-1133.5 ; 2083,-1133.5 2083,-523.5 ; 3350,-726.83 3350,-523.5 ; 4190,-726.83 4190,-523.5 ; 4812,-1140 4812,-937.17
  text "COMPONENTS MARKED 'DNP' SHOULD NOT BE POPULATED." at 1063.5,-318.5 h60
  text "ASSEMBLY VARIANT:" at 1063,-434 h60
  text ".VariantName" at 2099,-434 h60
  text "PCB VIEWED FROM TOP SIDE" at -318.5,-655.67 h60
  text "BOARD #:" at 2158,-655.67 h60
  text ".PRJ_Number" at 2703.5,-655.67 h60
  text "REV:" at 3548,-655.67 h60
  text ".PCB_Rev" at 3839.5,-655.67 h60
  text "SVN REV:" at 4386,-655.67 h60
  text ".VersionControl_RevNumber" at 4892,-655.67 h60
  text "TID #:" at 2158,-859 h60
  text ".TID" at 2703.5,-859 h60
  text "PLOT NAME =" at -318.5,-1064.34 h60
  text ".plot_File_Name" at 487,-1064.34 h60
  text "GENERATED    :" at 2160,-1064.34 h60
  text ".Print_Date" at 3029.5,-1064.34 h60
  text ".Print_Time" at 3758.5,-1064.34 h60
  text "TEXAS INSTRUMENTS" at 5023,-1064.34 h60
M6 Assembly Bottom:
  lines w10: -382.5,-727.33 6219.5,-727.33 ; -380.5,-930.67 6219.5,-930.67 ; 1025.5,-1140.5 1025.5,-937.67 ; 1647.5,-727.33 1647.5,-524 ; 2487.5,-727.33 2487.5,-524 ; 3754.5,-1134 3754.5,-524 ; 4643.5,-1134 6219,-1134 6219,-524 -382.5,-524 -382.5,-1134 2214.5,-1134 6219.5,-1134 6219.5,-524
  text "COMPONENTS MARKED 'DNP' SHOULD NOT BE POPULATED." at 6012,-318 h60
  text ".VariantName" at 4968,-434 h60
  text "ASSEMBLY VARIANT:" at 6007,-434 h60
  text ".VersionControl_RevNumber" at 945.5,-656.17 h60
  text "SVN REV:" at 1451.5,-656.17 h60
  text ".PCB_Rev" at 1998,-656.17 h60
  text "REV:" at 2289.5,-656.17 h60
  text ".PRJ_Number" at 3134,-656.17 h60
  text "BOARD #:" at 3679.5,-656.17 h60
  text "PCB VIEWED FROM BOTTOM SIDE" at 6156,-656.17 h60
  text ".TID" at 3134,-859.5 h60
  text "TID #:" at 3679.5,-859.5 h60
  text "TEXAS INSTRUMENTS" at 814.5,-1064.84 h60
  text ".Print_Time" at 2079,-1064.84 h60
  text ".Print_Date" at 2808,-1064.84 h60
  text "GENERATED    :" at 3677.5,-1064.84 h60
  text ".plot_File_Name" at 5350.5,-1064.84 h60
  text "PLOT NAME =" at 6156,-1064.84 h60
M9 Title Sheet:
  drawing of 57 lines, arcs and shapes, not listed
  text "1" at 649.84,8036.5 h70
  text "2" at 3145.5,8036.5 h70
  text "3" at 5634.84,8036.5 h70
  text "4" at 8141.51,8036.5 h70
  text "5" at 10640.5,8036.5 h70
  text "6" at 13145.5,8036.5 h70
  text "A" at -506.5,6893.5 h70
  text "A" at 14293.5,6893.5 h70
  text "B" at -506.5,4513.5 h70
  text "B" at 14293.5,4513.5 h70
  text "C" at -506.5,2138.5 h70
  text "C" at 14293.5,2138.5 h70
  text "PROJECT TITLE:" at 11253.5,277.5 h45
  text ".PRJ_Title" at 11303.5,144.17 h70
  text "DESIGNED FOR:" at 11253.5,-23.5 h45
  text ".PRJ_Customer" at 11303.5,-163.5 h70
  text "D" at -506.5,-231.5 h70
  text "D" at 14293.5,-231.5 h70
  text "FILE NAME:" at 11253.5,-323.5 h45
  text ".PCB_File_Name_No_Path" at 11303.5,-443.5 h70
  text "Texas Instruments (TI) and/or its licensors do not warrant the accuracy or completeness of this specification" at 6284,-605.34 h45
  text "ENGINEER:" at 11253.5,-613.5 h45
  text "LAYOUT BY:" at 12758.5,-613.5 h45
  text "or any information contained therein. TI and/or its licensors do not warrant that this design will meet" at 6239.01,-718 h45
  text ".PRJ_Engineer" at 11303.5,-768.49 h70
  text ".PCB_Layout" at 12809,-768.49 h70
  text "the specifications, will be suitable for your application or fit for any particular purpose, or will operate in" at 6239.01,-830.67 h45
  text ".Layer_Name" at 487,-858.49 h60
  text "ALTIUM DESIGNER VERSION:" at 12758.5,-923.5 h45
  text "an implementation. TI and/or its licensors do not warrant that the design is production worthy. You should" at 6239.01,-943.33 h45
  text "completely validate and test your design implementation to confirm the system functionality for your application." at 6284,-1056 h45
  text ".print_Scale" at 11303.5,-1056.83 h70
  text ".Application_BuildNumber" at 12809,-1056.83 h70
  text "1" at 649.84,-1263.5 h70
  text "2" at 3145.5,-1263.5 h70
  text "3" at 5634.84,-1263.5 h70
  text "4" at 8141.51,-1263.5 h70
  text "5" at 10640.5,-1263.5 h70
  text "6" at 13145.5,-1263.5 h70
M10 Fab Notes:
  drawing of 189 lines, arcs and shapes, not listed
  text "DESIGN INFORMATION" at 12292.02,6356.17 h60
  text "MIN. TRACK WIDTH:" at 11647.46,6224.05 h60
  text "8" at 12743.7,6224.05 h60
  text "MIL" at 12898.46,6224.05 h60
  text "MIN. CLEARANCE:" at 11647.46,6099.92 h60
  text "0.2" at 12683.7,6099.93 h60
  text "mm" at 12898.46,6099.92 h60
  text "MIN. VIA PAD SIZE:" at 11647.46,5975.8 h60
  text "24" at 12713.71,5975.8 h60
  text "MIL" at 12898.46,5975.8 h60
  text "0.05mm (2MIL)" at 12342.46,5845.9 h60
  text "MINIMUM ANNULAR RING" at 11318.23,5837.67 h60
  text "EXTERNAL" at 13050.46,5837.67 h60
  text "PER" at 11518.23,5727.55 h60
  text "IPC-D-275 CLASS 2 LEVEL C" at 11738.23,5727.54 h60
  text "MIL, HOLES" at 13226.46,5627.07 h60
  text "+/-" at 12834,5618.48 h60
  text "+/-" at 13688,5618.48 h60
  text "REGISTRATION TOLERANCES:" at 11318.23,5617.42 h60
  text "METAL" at 12518,5617.42 h60
  text "5" at 13094.2,5617.42 h60
  text "3" at 13927.2,5617.42 h60
  text "MIL" at 14043.46,5617.42 h60
  text "HOLE SIZE TOLERANCE (UNLESS OTHERWISE SPECIFIED):" at 11318.23,5519.1 h60
  text "+/-" at 13688,5516.23 h60
  text "3" at 13927.2,5515.17 h60
  text "MIL" at 14043.46,5515.17 h60
  text "MATERIAL:" at 11243.46,5377.52 h60
  text "FR-4 High Tg" at 12229.9,5249 h60
  text "X" at 12085.46,5241.01 h60
  text "FR-408" at 11664.46,5236.49 h60
  text "OTHER" at 13152.46,5236.49 h60
  text "62 MIL (1.6mm) +/-10%" at 11984.56,5093.46 h60
  text "X" at 11864.46,5091.01 h60
  text "THICKNESS:" at 11318.23,5085.24 h60
  text "OTHER" at 13269.46,5085.24 h60
  text "TOLERANCE:" at 11318.23,4946.92 h60
  text "X" at 12166.46,4946.92 h60
  text "ANSI IPC-6012 TYPE 3 CLASS 2" at 12344.48,4946.92 h60
  text "OTHER +/-" at 12344.46,4802.73 h60
  text "BOW & TWIST:" at 11318.23,4657.54 h60
  text "X" at 12166.46,4657.54 h60
  text "ANSI IPC-6012 TYPE 3 CLASS 2" at 12344.48,4657.54 h60